# EAGLE board PR9010 (EAGLE 7.2.0)
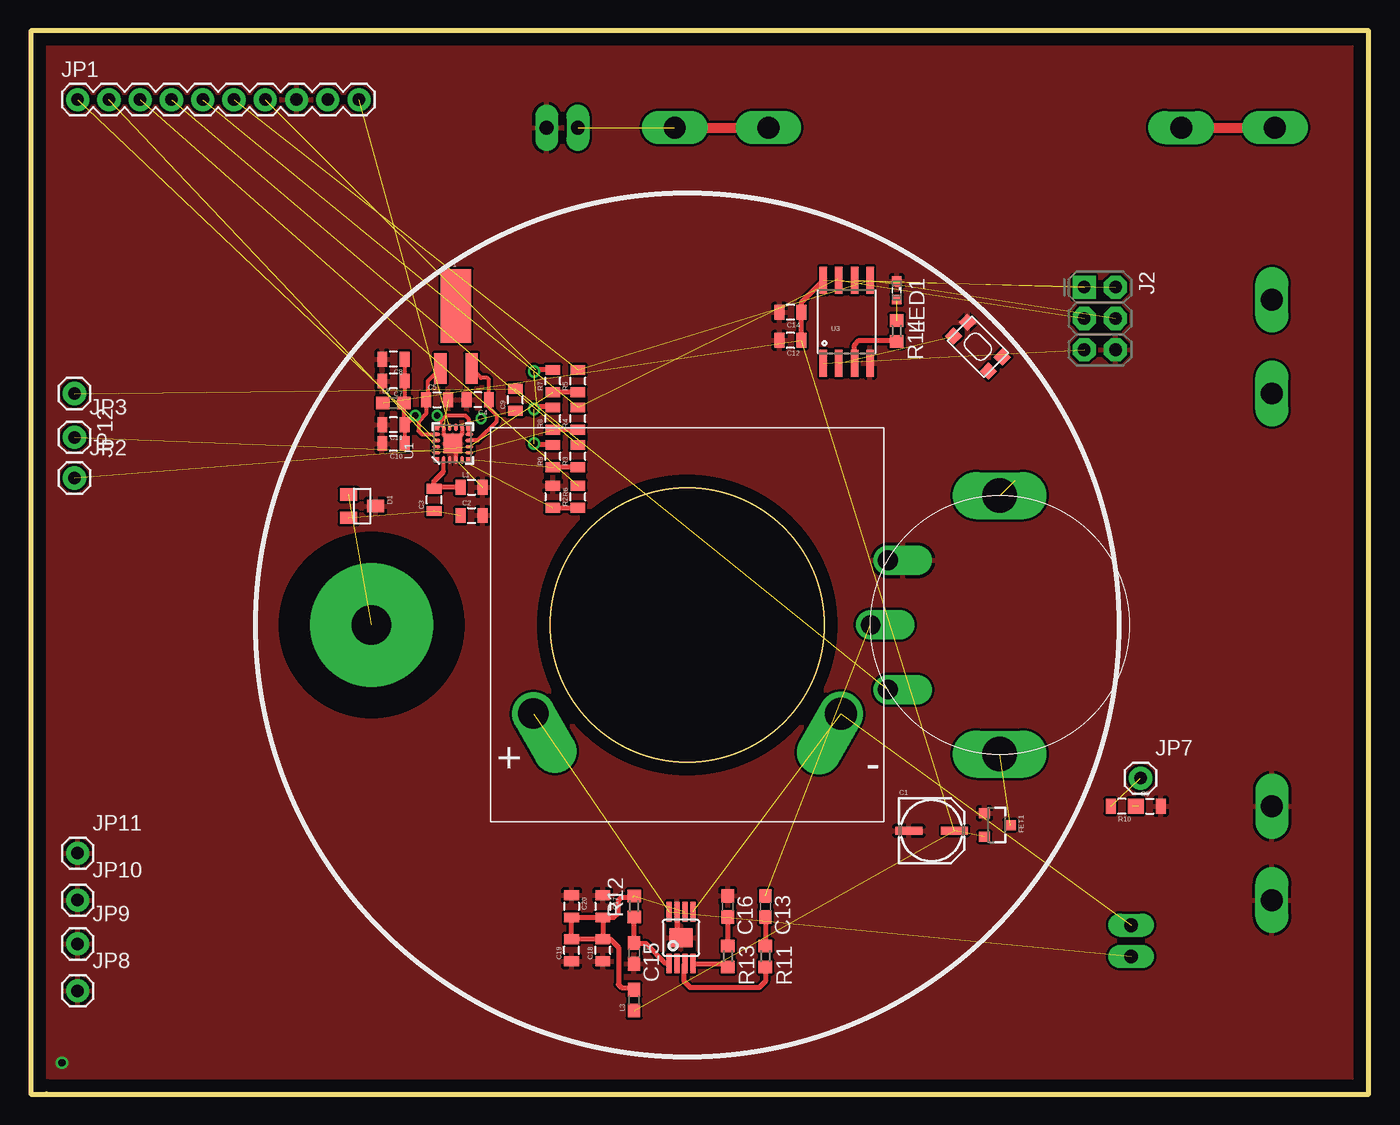
[diagram p0: board, top side]
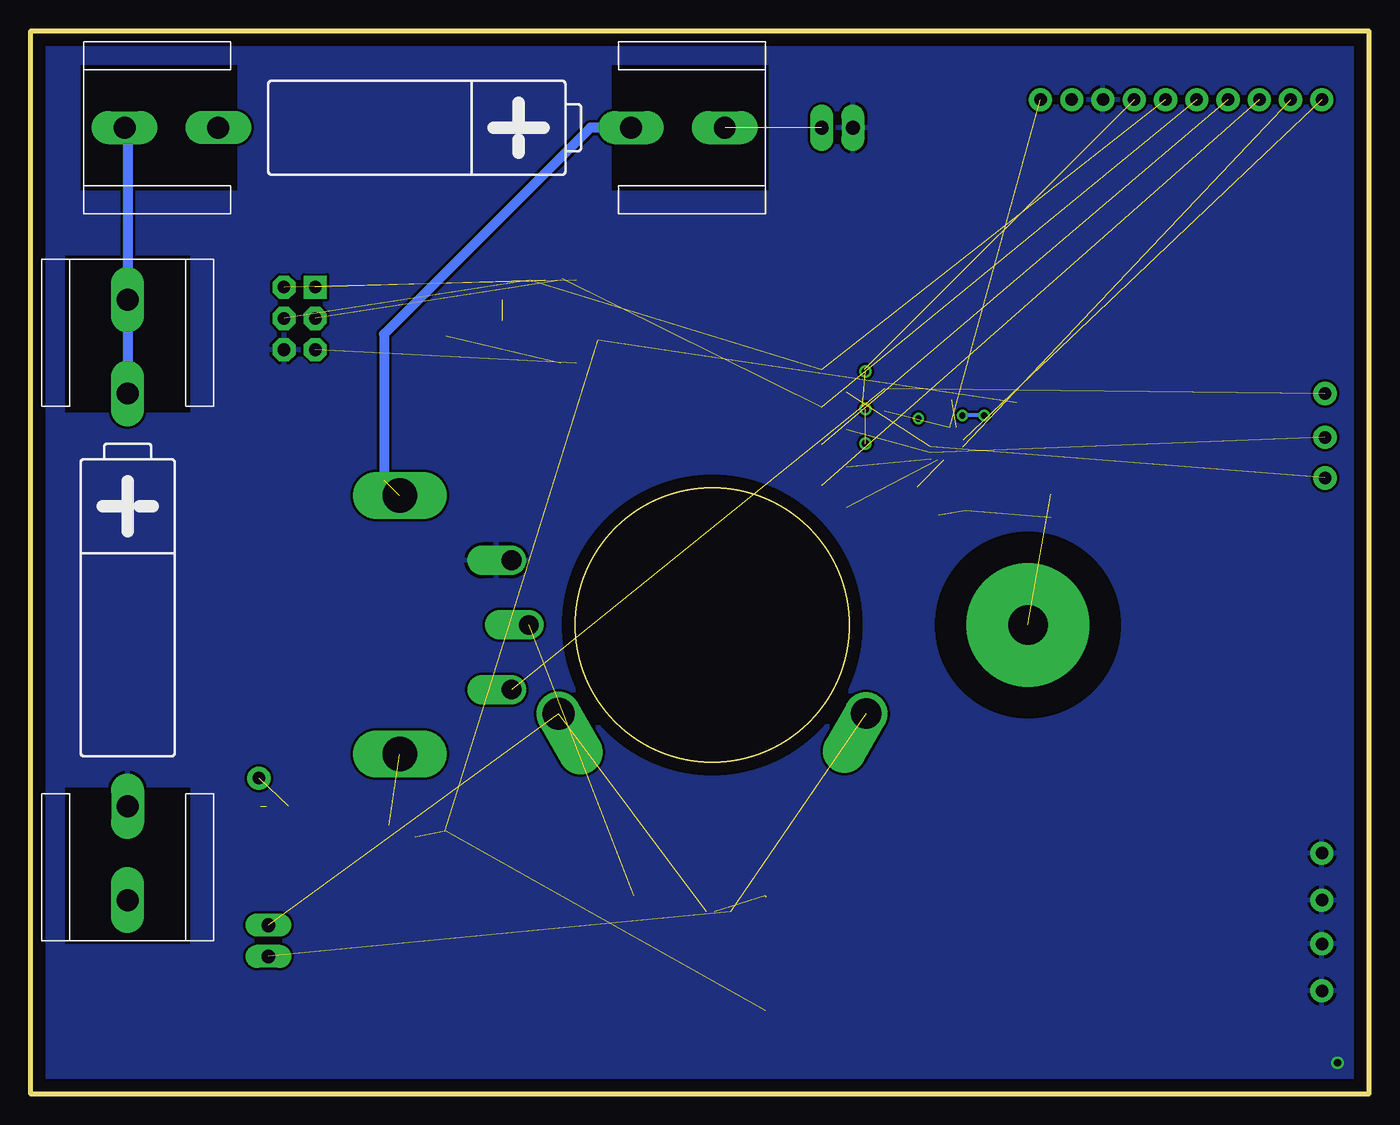
[diagram p1: board, bottom side, seen from below]

Size 108.71 x 86.36 mm. Coordinates in mm from the lower left corner, seen from the top.
Outline: 1.27,0 71.55,0
Outline: 1.27,0 0,0 0,86.36 108.71,86.36 108.71,0 1.27,0
Copper layers (1*16): Top 0.035mm / dielectric 1.5mm / Bottom 0.035mm
Design rules "default": minimum track width 10mil, minimum drill 24mil, track to track 8mil, track to pad 8mil, pad to pad 8mil, via to via 8mil, smd to smd 8mil, copper to edge 40mil, drill to drill 8mil, minimum pad ring 10mil, minimum via ring 8mil, stop-mask expansion 4mil, vias tented up to drill 0mil, thermal gap 10mil

## Footprints (pad centres in the part's own frame; a part is rotated, then mirrored left to right if it is on the bottom)
PANASONIC_C = smd 2.2 x 0.65: + 1.9,-0.2; - -1.8,-0.2
0805 = smd 0.8 x 1.2: 1 -0.9,0; 2 0.9,0
C0603 = smd 1.1 x 1: 1 -0.85,0; 2 0.85,0
SOT23 = smd 1 x 1.4: 1 -0.95,-1.1; 2 0.95,-1.1; 3 0,1.1
SI2333DDS = smd 0.8 x 0.9: 1 -0.95,-1; 2 0.95,-1; 3 0,1.1
M3_SCREW_POST = drill 3.2 pad 10: P$1 0,0
2X3-NS = drill 1.016 pad 1.88 square: 1 -2.54,-1.27 | drill 1.016 pad 1.88 octagon: 2 -2.54,1.27; 3 0,-1.27; 4 0,1.27; 5 2.54,-1.27; 6 2.54,1.27
1X10 = drill 1.016 pad 1.88: 1 0,0; 2 2.54,0; 3 5.08,0; 4 7.62,0; 5 10.16,0; 6 12.7,0; 7 15.24,0; 8 17.78,0; 9 20.32,0; 10 22.86,0
1X01 = drill 1.016 pad 1.88: 1 0,0
1X02_LONGPADS = drill 1.118 pad 1.88 long: 1 0,0; 2 2.54,0
BK-92_MPD_AA_BATT_CLIP = drill 1.778 long: NEG -24.384,0; NEG@2 -16.764,0; POS 16.764,0; POS@2 24.384,0
0603 = smd 1.1 x 1: 1 -0.85,0; 2 0.85,0
SML0603 = smd 0.8 x 0.8: A 0.75,0; C -0.75,0
RV170SF_TAIWANA_POT_SW = drill 1.6 offset: GND -5.25,-9.09; SIGNAL 5.25,-9.09; WIPER 0,-10.5 | drill 2.8 long: SW_IN 10.5,0; SW_OUT -10.5,0
R0603 = smd 1 x 1.1: 1 -0.85,0; 2 0.85,0
KMR2 = smd 1 x 1: 1 2,0.8; 2 2,-0.8; 3 -2,0.8; 4 -2,-0.8
SPARKFUN_SI470X = smd 0.34 x 0.34: 1 -1.275,1.265; 6 -1.265,-1.265; 11 1.265,-1.265; 16 1.265,1.265 | smd 0.61 x 0.28: 2 -1.335,0.75; 3 -1.335,0.25; 4 -1.335,-0.25; 5 -1.335,-0.75; 12 1.335,-0.75; 13 1.335,-0.25; 14 1.335,0.25; 15 1.335,0.75 | smd 0.28 x 0.61: 7 -0.75,-1.335; 8 -0.25,-1.335; 9 0.25,-1.335; 10 0.75,-1.335; 17 0.75,1.335; 18 0.25,1.335; 19 -0.25,1.335; 20 -0.75,1.335 | smd 1.6 x 1.6: 21 0,0
POWER-SOP8 = smd 0.4 x 1.6: 1 -0.975,-2.1; 2 -0.325,-2.1; 3 0.325,-2.1; 4 0.975,-2.1; 5 0.975,2.1; 6 0.325,2.1; 7 -0.325,2.1; 8 -0.975,2.1 | smd 1.89 x 1.57: 9 0,0
SO08-EIAJ = smd 0.61 x 2.21: 1 -1.905,-3.378; 2 -0.635,-3.378; 3 0.635,-3.378; 4 1.905,-3.378; 5 1.905,3.353; 6 0.635,3.353; 7 -0.635,3.353; 8 -1.905,3.353
CE32A_DAYTON_SPKR = drill 2.5 offset: + -12.5,-7.2 | drill 2.6 offset: - 12.5,-7.2
CRYSTAL-32KHZ-SMD = smd 2.5 x 6: SHEILD 0,5.08 | smd 1 x 2.5: X1 -1.27,0; X2 1.27,0

## Placement (x,y rotation side)
C1  220uF  [PANASONIC_C]  73.15,21.59 0 top
C2  1.0uF  [0805]  35.81,46.99 0 top
C3  1.0uF  [0805]  32.77,48.26 90 top
C4  22pf  [0805]  36.32,56.39 180 top
C5  22pf  [0805]  33.02,56.39 0 top
C6  [0805]  90.93,23.37 0 top
C7  1.0uF  [0805]  29.46,57.91 180 top
C8  1.0uF  [0805]  29.46,59.69 180 top
C9  1.0uF  [0805]  39.37,56.39 90 top
C10  1.0uF  [0805]  29.46,52.83 180 top
C11  1.0uF  [0805]  29.46,54.36 180 top
C12  .1uf  [0805]  61.72,61.21 180 top
C13  .033uf  [C0603]  59.69,15.24 270 top
C14  10uf  [0805]  61.72,63.5 180 top
C15  10uf  [C0603]  49.02,11.43 270 top
C16  .033uf  [C0603]  56.64,15.24 270 top
C17  1uf  [0805]  46.48,15.24 270 top
C18  10uf  [0805]  46.48,11.68 90 top
C19  .1uf  [0805]  43.94,11.68 90 top
C20  100pf  [0805]  43.94,15.24 270 top
D1  [SOT23]  26.92,47.75 270 top
FET1  SI2333DDS  [SI2333DDS]  78.49,21.84 270 top
J1  M3_SCREW_POST  [M3_SCREW_POST]  27.69,38.1 0 top
J2  AVR_SPI_PRG_6NS  [2X3-NS]  86.87,62.99 270 top
JP1  M10"  [1X10]  3.81,80.77 0 top
JP2  M01PTH  [1X01]  3.56,50.04 0 top
JP3  M01PTH  [1X01]  3.56,53.34 0 top
JP4  M02PTH3  [1X02_LONGPADS]  44.45,78.49 180 top
JP5  BK-92_MPD_AA_BATT_CLIP  [BK-92_MPD_AA_BATT_CLIP]  76.71,78.49 0 bottom
JP6  BK-92_MPD_AA_BATT_CLIP  [BK-92_MPD_AA_BATT_CLIP]  100.84,40.13 90 bottom
JP7  M01PTH  [1X01]  90.17,25.65 0 top
JP8  M01PTH  [1X01]  3.81,8.38 0 top
JP9  M01PTH  [1X01]  3.81,12.19 0 top
JP10  M01PTH  [1X01]  3.81,15.75 0 top
JP11  M01PTH  [1X01]  3.81,19.56 0 top
JP12  M01PTH  [1X01]  3.56,56.9 270 top
JP13  M02PTH3  [1X02_LONGPADS]  89.41,13.72 270 top
L1  [0805]  35.81,49.28 0 top
L2  2.5k@100MHz  [0603]  29.46,56.13 0 top
L3  2.5 kOhm @ 100MHz  [0603]  49.02,7.62 90 top
LED1  [SML0603]  70.36,65.28 270 top
R1  RV170SF_TAIWANA_POT_SW  [RV170SF_TAIWANA_POT_SW]  78.74,38.1 270 top
R2  330  [0805]  44.45,48.51 90 top
R3  330  [0805]  44.45,51.82 90 top
R4  330  [0805]  44.45,54.86 90 top
R5  330  [0805]  44.45,57.91 90 top
R6  10K  [0805]  42.42,48.51 270 top
R7  4.7K  [0805]  42.42,57.91 90 top
R8  4.7K  [0805]  42.42,54.86 90 top
R9  4.7K  [0805]  42.42,51.82 90 top
R10  [0805]  88.65,23.37 180 top
R11  40.2K  [R0603]  59.69,11.18 270 top
R12  10K  [R0603]  49.02,15.24 90 top
R13  40.2K  [R0603]  56.64,11.18 270 top
R14  1K  [R0603]  70.36,61.98 270 top
SW1  SPST_TACT-KMR2  [KMR2]  76.96,60.71 135 top
U1  SI4703  [SPARKFUN_SI470X]  34.29,52.83 90 top
U2  TPA2005D1DGN  [POWER-SOP8]  52.83,12.7 0 top
U3  Tiny85-20-SMT  [SO08-EIAJ]  66.29,62.74 0 top
U$3  CE32A_DAYTON_SPKR  [CE32A_DAYTON_SPKR]  53.34,38.1 0 top
Y1  32.768kHz  [CRYSTAL-32KHZ-SMD]  34.54,58.93 0 top

## Library data of the parts
C1 C4-C6 C12 C14 C17-C20 L1-L3 R2-R10 = SparkFun-Passives
C2 C3 C7-C11 = SparkFun-Capacitors; PROD_ID: CAP-11625
C13 C15 C16 R11-R14 = resistor
D1 = SparkFun-DiscreteSemi; PROD_ID: DIO-10647
FET1 = PubRadioLib
J1 JP5 JP6 R1 U$3 = PR_Libraries
J2 JP1-JP4 JP7-JP13 = SparkFun-Connectors
LED1 = led
SW1 = adafruit
U1 = FM-Meter-Driver-v11
U2 = SparkFun-AnalogIC
U3 = SparkFun-DigitalIC; PROD_ID: IC-09092
Y1 = SparkFun

## Nets
3.3V: JP1.7 R7.2 R8.2 R9.2
!RST: JP1.3 R2.2
!RST-L: R2.1 R6.2 U1.5
!SEN: JP1.4 R3.2
!SEN-L: R3.1 R9.1 U1.6
A_IN: C9.2 JP12.1 R1.SIGNAL
A_OUT: C13.1 R1.WIPER
GND: C1.- C2.2 C4.2 C5.2 C6.2 C7.2 C8.2 C10.2 C11.2 C12.2 C14.2 C15.2 C16.1 C17.1 C18.1 C19.1 C20.1 D1.3 FET1.1 J2.6 JP1.8 JP4.2 JP6.NEG JP6.NEG@2 JP8.1 JP9.1 JP10.1 JP11.1 L1.2 LED1.C R1.GND R6.1 SW1.2 U1.3 U1.4 U1.12 U1.15 U1.21 U2.7 U2.9 U3.4
GPIO1: JP1.2 U1.19
GPIO2: JP1.1 U1.18
LOUT: C9.1 JP1.10 U1.14
N$1: C4.1 U1.9 Y1.X2
N$2: C5.1 U1.17 Y1.X1
N$3: C13.2 R11.1
N$4: R11.2 U2.3
N$5: R13.2 U2.4
N$6: C3.2 L1.1 U1.2
N$7: LED1.A R14.1
N$8: JP7.1 R10.2
N$9: C7.1 C8.1 C10.1 C11.1 L2.2 U1.10 U1.11 U1.16
N$11: SW1.1 U3.2
N$12: R14.2 U3.3
N$13: JP5.NEG JP5.NEG@2 JP6.POS JP6.POS@2
N$14: D1.1 J1.P$1
N$15: JP4.1 JP5.POS JP5.POS@2 R1.SW_OUT
N$17: C2.1 C3.1 D1.2
N$18: C17.2 C18.2 C19.2 C20.2 L3.2 R12.2 U2.6
N$20: C15.1 R12.1 U2.1
N$23: C16.2 R13.1
N$34: FET1.3 R1.SW_IN
N$35: C6.1 R10.1
OUT+: JP13.1 U2.5 U$3.-
OUT-: JP13.2 U2.8 U$3.+
PB1: J2.1 U3.6
PB5: J2.5 U3.1
ROUT: JP1.9
SCLK: J2.3 JP1.5 R4.2 U3.7
SCLK-L: JP3.1 R4.1 R8.1 U1.7
SDIO: J2.4 JP1.6 R5.2 U3.5
SDIO-L: JP2.1 R5.1 R7.1 U1.8
VCC: C1.+ C12.1 C14.1 FET1.2 J2.2 L2.1 L3.1 U3.8

## Tracks (layer width: path | path; a pad name or v marks a point on that pad's centre or on a via)
3.3V  (via drill 0.6)  (3 unrouted)
  Top 0.406: R9.2 41.01,52.72 v40.89,52.83 | v40.89,55.63 41.15,55.88 42.3,55.88 R8.2 | R7.2 41.03,58.81 v40.89,58.67
!RST  (1 unrouted)
!RST-L  (1 unrouted)
  Top 0.406: R6.2 R2.1
!SEN  (1 unrouted)
!SEN-L  (1 unrouted)
  Top 0.406: R3.1 R9.1
A_IN  (2 unrouted)
A_OUT  (1 unrouted)
GND  (via drill 0.6)  (2 unrouted)
  Top 0.305: U1.4 34.54,52.58 U1.21 | U1.15 33.54,53.58 U1.21 | U1.12 35.04,53.61 35.05,53.59 U1.21
  Top 0.406: U2.7 52.51,13.03 U2.9
  other vias: 2.54,2.54
  pour Top: 111.76,-1.27 111,88.9 -1.52,89.66 -0.76,-0.51
  pour Bottom: 111.76,-1.27 110.49,89.41 -2.03,89.92 -0.76,-0.76
GPIO1  (1 unrouted)
GPIO2  (1 unrouted)
LOUT  (2 unrouted)
N$1
  Top 0.305: U1.9 36.32,53.09 37.85,54.61 37.85,55.12 37.22,55.74 C4.1 37.22,58.03 37.08,58.17 36.58,58.17 Y1.X2
N$2
  Top 0.305: Y1.X1 32.26,57.91 32.26,56.53 C5.1 32.12,55.23 31.5,54.61 31.5,53.85 31.75,53.59 32.94,53.59 U1.17
N$3
  Top 0.406: C13.2 R11.1
N$4
  Top 0.406: R11.2 59.69,9.14 59.18,8.64 53.59,8.64 53.09,9.14 53.09,10.53 U2.3
N$5
  Top 0.406: U2.4 56.37,10.6 R13.2
N$6
  Top 0.305: 33.53,50.55 33.53,51.48 U1.2
  Top 0.406: L1.1 32.88,49.28 C3.2 32.77,49.78 33.53,50.55
N$7  (1 unrouted)
N$8  (1 unrouted)
N$9  (via drill 0.5)
  Top 0.305: C8.1 C7.1 30.36,56.18 L2.2 30.31,54.41 C11.1 | C11.1 C10.1 | C11.1 30.48,54.36 v31.24,55.12 | v33.02,55.12 33.27,54.86 33.27,54.35 U1.16 33.02,54.36 33.78,55.12 35.31,55.12 35.56,54.86 U1.11 35.55,53.65 U1.10
  Bottom 0.305: v31.24,55.12 v33.02,55.12
N$10  (via drill 0.5)
  other vias: 36.58,54.86
N$11  (1 unrouted)
N$12
  Top 0.406: U3.3 66.93,60.83 67.31,61.21 70.27,61.21 R14.2
N$13
  Top 0.813: JP5.NEG@2 JP5.NEG | JP5.NEG 101.85,78.49 101.85,78.74 101.09,78.74 JP5.NEG
  Bottom 0.813: JP5.NEG 100.84,78.23 JP6.POS@2 JP6.POS
N$14  (1 unrouted)
N$15  (2 unrouted)
  Top 0.813: JP5.POS@2 JP5.POS
  Bottom 0.813: JP5.POS 63.25,78.49 80.01,61.72 80.01,49.87
N$17  (2 unrouted)
N$18  (2 unrouted)
  Top 0.406: C17.2 C18.2 | C19.2 43.94,12.7 | 43.94,12.7 C20.2 C17.2 | C18.2 44.06,12.58 43.94,12.7 | C17.2 47.36,14.34 47.75,14.73 47.75,15.75 48.01,16 48.93,16 | C18.2 47.11,12.58 47.75,11.94 47.75,8.89 48.01,8.64 48.86,8.64 L3.2
N$20
  Top 0.406: U2.1 51.63,10.6 50.04,12.19 49.11,12.19 C15.1 R12.1
N$23
  Top 0.406: R13.1 C16.2
N$34  (1 unrouted)
N$35  (1 unrouted)
OUT+  (2 unrouted)
OUT-  (2 unrouted)
PB1  (1 unrouted)
PB5  (1 unrouted)
SCLK  (3 unrouted)
  Top 0.406: 65.53,66.22 U3.7
SCLK-L  (2 unrouted)
  Top 0.406: R4.1 R8.1
SDIO  (3 unrouted)
SDIO-L  (2 unrouted)
  Top 0.406: R5.1 R7.1
VCC  (5 unrouted)
  Top 0.406: C12.1 C14.1 62.62,64.32 U3.8